# Altium PCB ESC_GEMINI.PcbDoc (part 1 of 4)
Units mm, origin at the board's own origin, x right, y up, seen from the top; angles counter-clockwise.
Board outline 12 x 35 mm, 6 copper layers (F.Cu, In1.Cu, In2.Cu, In3.Cu, In4.Cu, B.Cu); 97 components, 64 nets, 285 pads, 618 vias.
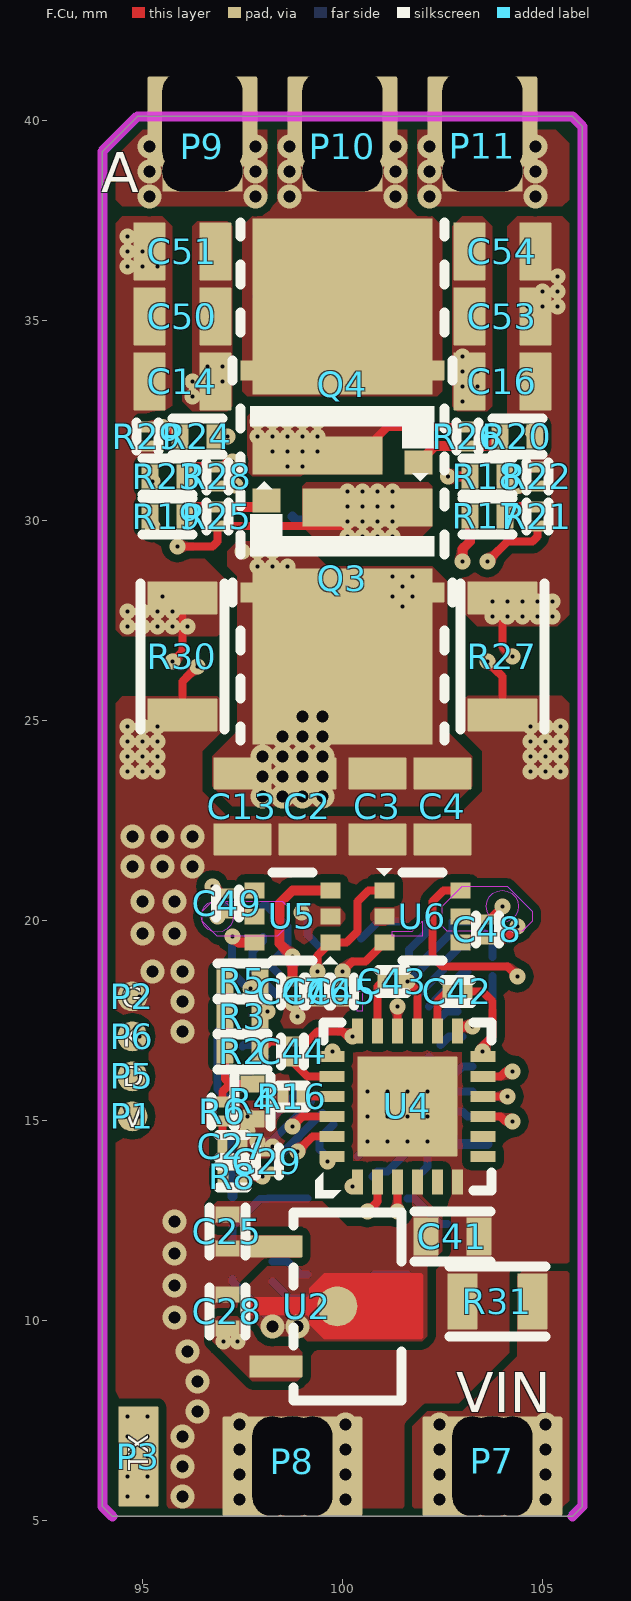
[diagram p0: F.Cu view]
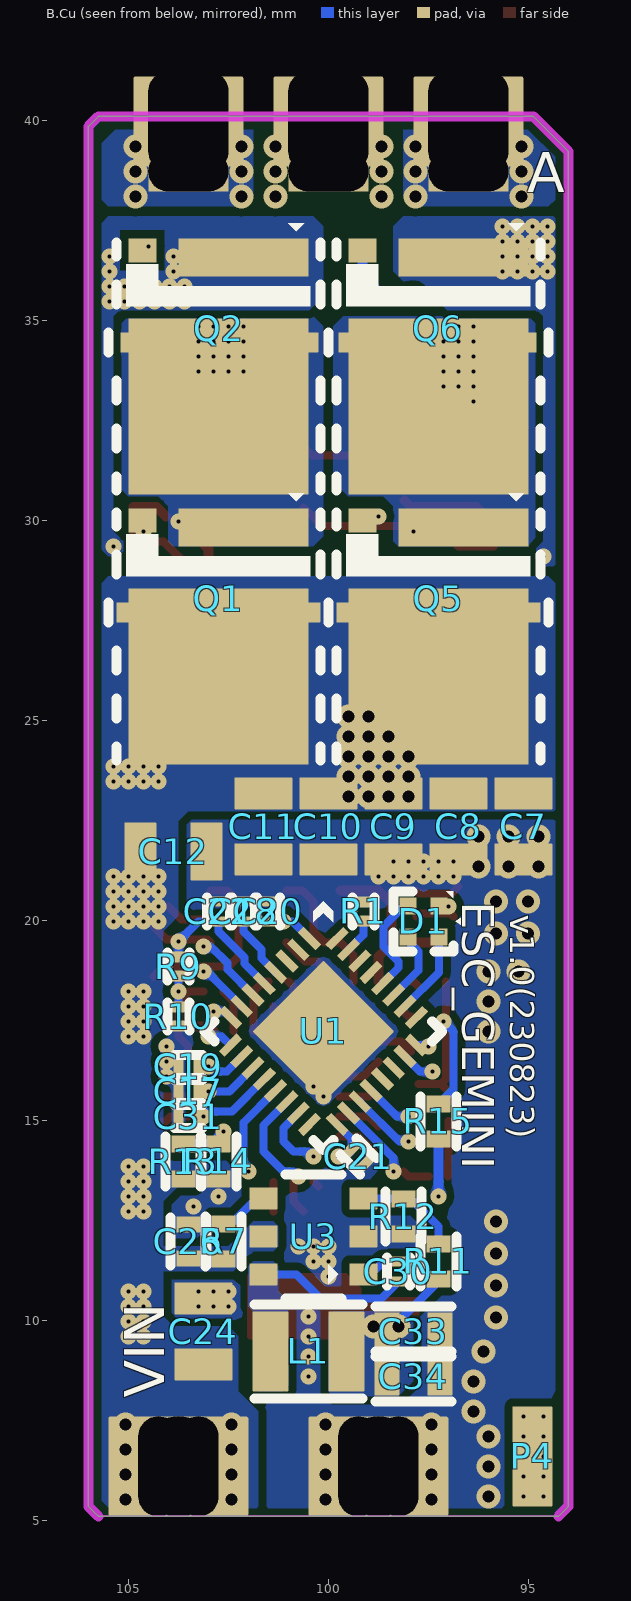
[diagram p1: B.Cu view, seen from below]
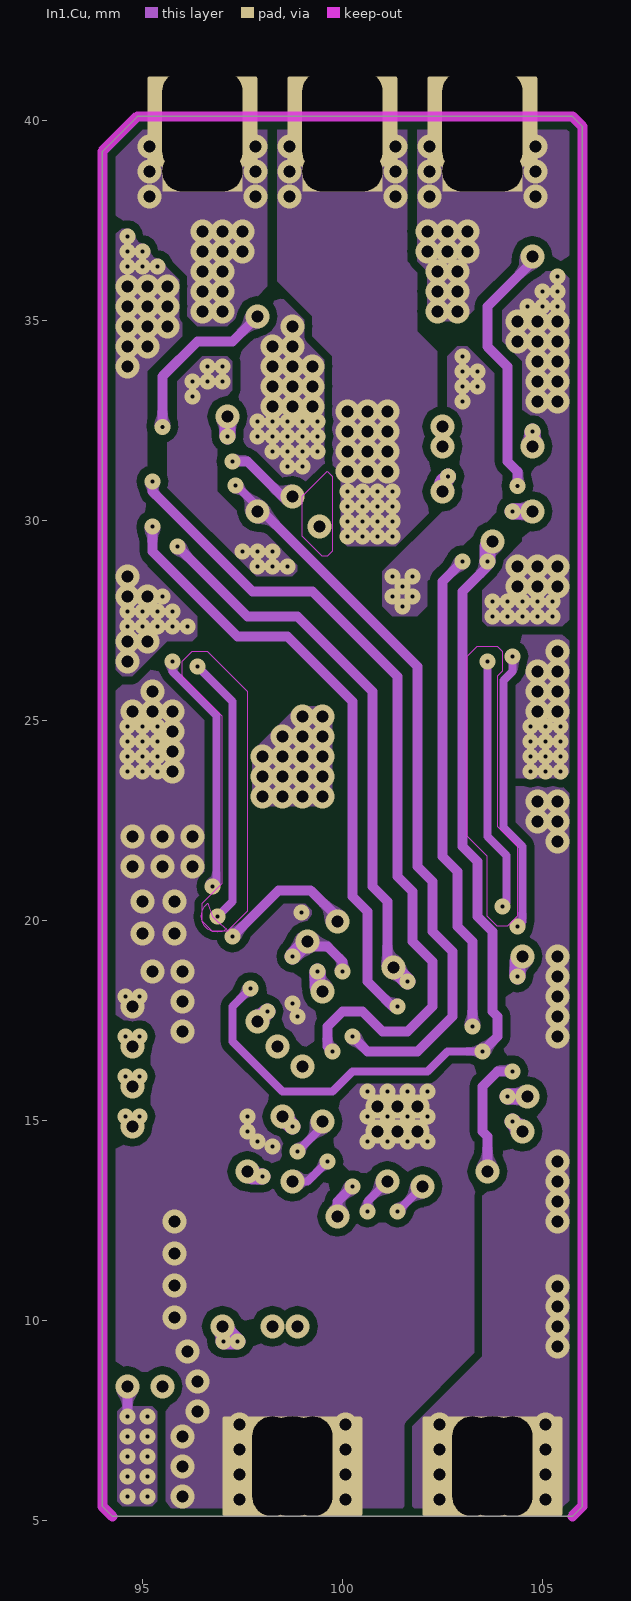
[diagram p2: In1.Cu]
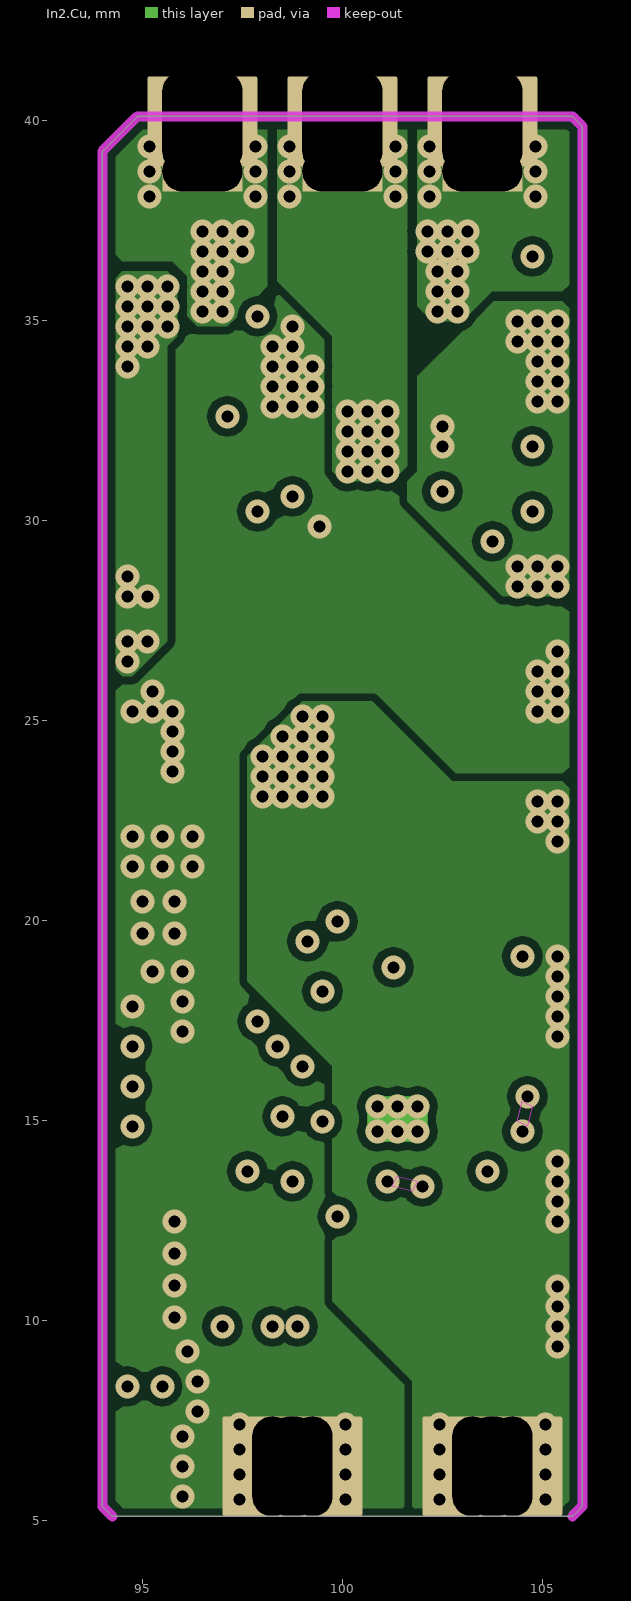
[diagram p3: In2.Cu]
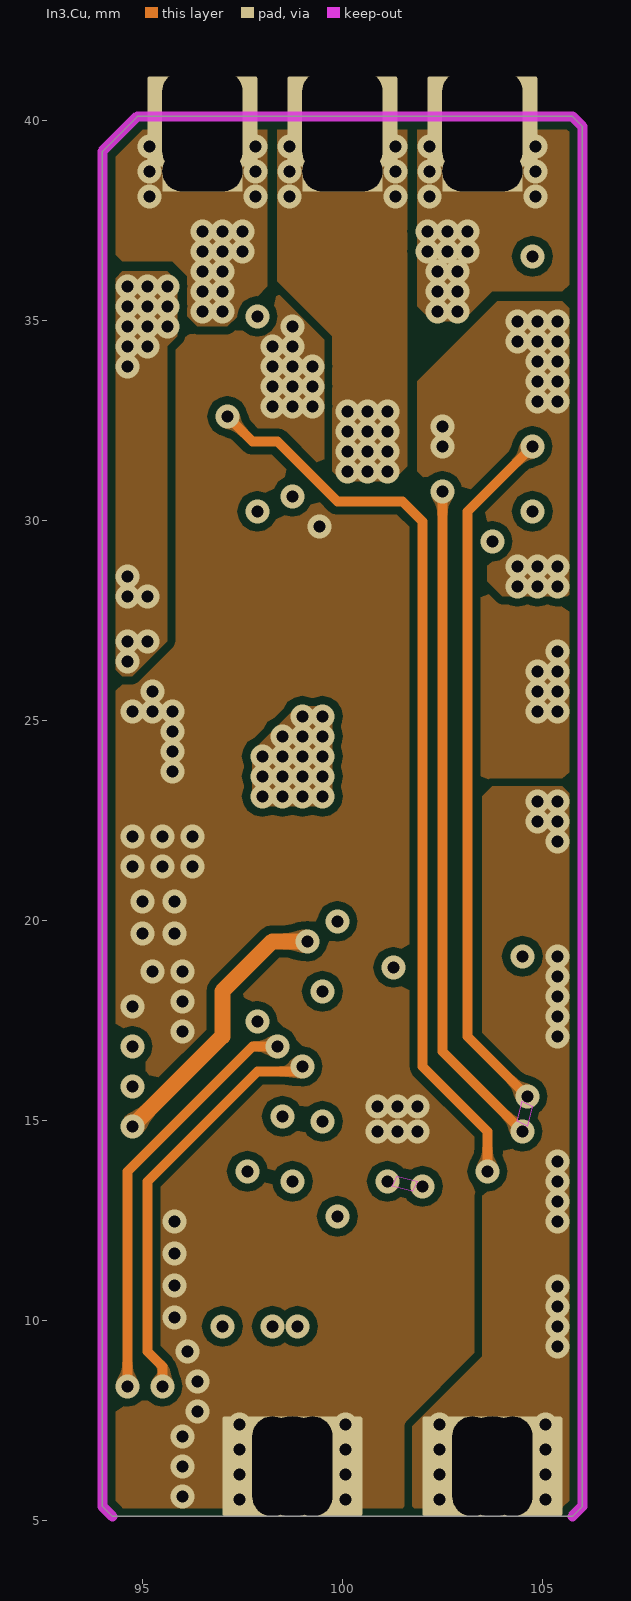
[diagram p4: In3.Cu]
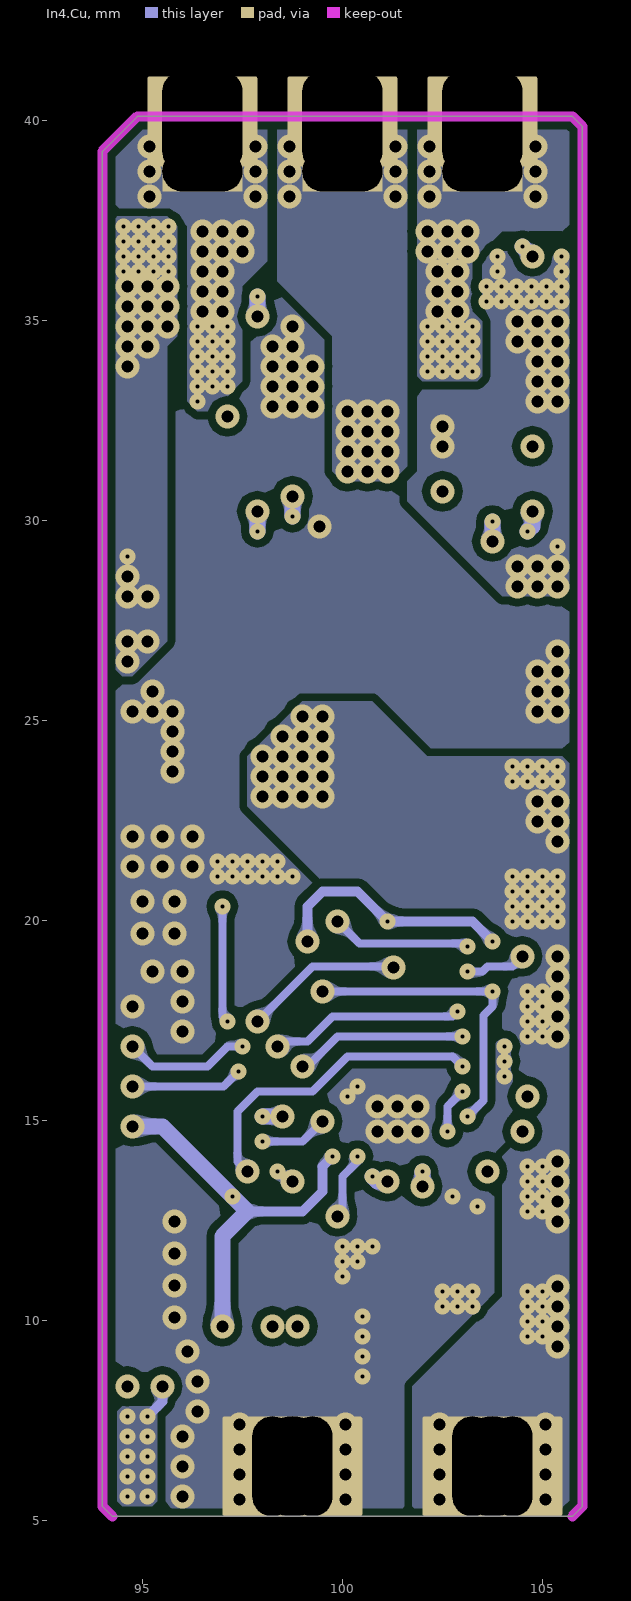
[diagram p5: In4.Cu]

## Layer stack, top to bottom
F.Mask: solder mask 0.0102, Solder Resist, Dk 3.5
F.Cu: signal copper 0.0356
Dielectric 1: dielectric 0.32, FR-4, Dk 4.8
In1.Cu: signal copper 0.0356
Dielectric2: dielectric 0.32, FR-4, Dk 4.8
In2.Cu: signal copper 0.0356
Dielectric3: dielectric 0.32, FR-4, Dk 4.8
In3.Cu: signal copper 0.0356
Dielectric4: dielectric 0.32, FR-4, Dk 4.8
In4.Cu: signal copper 0.0356
Dielectric5: dielectric 0.32, FR-4, Dk 4.8
B.Cu: signal copper 0.0356
B.Mask: solder mask 0.0102, Solder Resist, Dk 3.5

## Board outline
94.25,5.1 94,5.35 94,39.225 94.875,40.1 105.75,40.1 106,39.85 106,5.35 105.75,5.1 94.25,5.1

## Design rules (kind name [scope] priority, off if disabled: settings)
Clearance "Clearence 0.2_Polygon" [InNamedPolygon('F.Cu-/GND_C') OR InNamedPolygon('F.Cu-VBUS') OR InNamedPolygon('F.Cu-+6V') OR InNamedPolygon('F.Cu-/CTRL/PHB-1') OR InNamedPolygon('F.Cu-+3V3-3') OR InNamedPolygon('F.Cu-/GND_A-2') OR InNamedPolygon('F.Cu-VBUS-1') OR InNamedPolygon('F.Cu-GND-2') OR InNamedPolygon('F.Cu-VBUS-2') OR InNamedPolygon('F.Cu-/CTRL/PHB-3') OR InNamedPolygon('F.Cu-VBUS-3') OR InNamedPolygon('F.Cu-GND-3') OR InNamedPolygon('F.Cu-/CTRL/PHA-2') OR InNamedPolygon('B.Cu-/CTRL/PHA') OR InNamedPolygon('F.Cu-/CTRL/PHC-3') OR InNamedPolygon('B.Cu-/CTRL/PHC') OR InNamedPolygon('In1.Cu-VBUS-1') OR InNamedPolygon('In1.Cu-VBUS-2') OR InNamedPolygon('In1.Cu-/CTRL/PHB-2') OR InNamedPolygon('In1.Cu-/GND_C-2') OR InNamedPolygon('In1.Cu-/GND_A') OR InNamedPolygon('In1.Cu-/CTRL/PWM_IN-P') OR InNamedPolygon('In1.Cu-/CTRL/PHC-5') OR InNamedPolygon('In1.Cu-/CTRL/PHA-4') OR InNamedPolygon('In2.Cu-/CTRL/PHA') OR InNamedPolygon('In3.Cu-/CTRL/PHA') OR InNamedPolygon('In1.Cu-GND') OR InNamedPolygon('In2.Cu-GND') OR InNamedPolygon('In3.Cu-GND') OR InNamedPolygon('In4.Cu-GND') OR InNamedPolygon('B.Cu-GND') OR InNamedPolygon('In1.Cu-VBUS-3') OR InNamedPolygon('In3.Cu-VBUS-1') OR InNamedPolygon('In2.Cu-VBUS-1') OR InNamedPolygon('In2.Cu-/CTRL/PHC') OR InNamedPolygon('In3.Cu-/CTRL/PHC') OR InNamedPolygon('In2.Cu-/GND_A') OR InNamedPolygon('In3.Cu-/GND_A') OR InNamedPolygon('In4.Cu-/GND_A') OR InNamedPolygon('In2.Cu-/CTRL/PHB') OR InNamedPolygon('In3.Cu-/CTRL/PHB') OR InNamedPolygon('In4.Cu-/CTRL/PHB') OR InNamedPolygon('In2.Cu-/GND_C') OR InNamedPolygon('In4.Cu-/GND_C') OR InNamedPolygon('In3.Cu-/GND_C') OR InNamedPolygon('In4.Cu-/CTRL/PHA-1') OR InNamedPolygon('In4.Cu-/GND_A-1') OR InNamedPolygon('In4.Cu-VBUS-1') OR InNamedPolygon('In4.Cu-/CTRL/PHC') OR InNamedPolygon('In4.Cu-/CTRL/PWM_IN-N-1') OR InNamedPolygon('In4.Cu-/GND_C-1') OR InNamedPolygon('B.Cu-/CTRL/PHC-1') OR InNamedPolygon('B.Cu-VBUS-1') OR InNamedPolygon('B.Cu-/GND_A') OR InNamedPolygon('B.Cu-+6V') OR InNamedPolygon('B.Cu-VBUS-2') OR InNamedPolygon('B.Cu-/GND_A-1') OR InNamedPolygon('B.Cu-VBUS-3') OR InNamedPolygon('B.Cu-/GND_C') OR InNamedPolygon('B.Cu-Net-(U3-SW)') OR InNamedPolygon('B.Cu-/GND_C-1') OR InNamedPolygon('B.Cu-/CTRL/PHA-1')] p1: gap=0.2 ignorepadtopadclearanceinfootprint=FALSE
MinimumSolderMaskSliver [All] p1: minsoldermaskwidth=0
PolygonConnect Polygon_B.Cu-/CTRL/PHA-1_ConnectDirect [IsNamedPolygon('B.Cu-/CTRL/PHA-1')] p1: connectstyle=Direct reliefconductorwidth=0.254 reliefentries=4 polygonreliefangle="90 Angle" airgapwidth=0.254
PolygonConnect Polygon_B.Cu-Net-(Q6-Gate)_ConnectDirect [IsNamedPolygon('B.Cu-Net-(Q6-Gate)')] p2: connectstyle=Direct reliefconductorwidth=0.254 reliefentries=4 polygonreliefangle="90 Angle" airgapwidth=0.254
PolygonConnect Polygon_B.Cu-/GND_C-1_ConnectDirect [IsNamedPolygon('B.Cu-/GND_C-1')] p3: connectstyle=Direct reliefconductorwidth=0.254 reliefentries=4 polygonreliefangle="90 Angle" airgapwidth=0.254
PolygonConnect Polygon_B.Cu-/CTRL/SWCLK_ConnectDirect [IsNamedPolygon('B.Cu-/CTRL/SWCLK')] p4: connectstyle=Direct reliefconductorwidth=0.254 reliefentries=4 polygonreliefangle="90 Angle" airgapwidth=0.254
PolygonConnect Polygon_B.Cu-Net-(U3-SW)_ConnectDirect [IsNamedPolygon('B.Cu-Net-(U3-SW)')] p5: connectstyle=Direct reliefconductorwidth=0.254 reliefentries=4 polygonreliefangle="90 Angle" airgapwidth=0.254
PolygonConnect Polygon_B.Cu-/CTRL/BEMF_U-1_ConnectDirect [IsNamedPolygon('B.Cu-/CTRL/BEMF_U-1')] p6: connectstyle=Direct reliefconductorwidth=0.254 reliefentries=4 polygonreliefangle="90 Angle" airgapwidth=0.254
PolygonConnect Polygon_B.Cu-/GND_C_ConnectDirect [IsNamedPolygon('B.Cu-/GND_C')] p7: connectstyle=Direct reliefconductorwidth=0.254 reliefentries=4 polygonreliefangle="90 Angle" airgapwidth=0.254
PolygonConnect Polygon_B.Cu-/CTRL/PWM-BN_ConnectDirect [IsNamedPolygon('B.Cu-/CTRL/PWM-BN')] p8: connectstyle=Direct reliefconductorwidth=0.254 reliefentries=4 polygonreliefangle="90 Angle" airgapwidth=0.254
PolygonConnect Polygon_B.Cu-/CTRL/PWM-CN_ConnectDirect [IsNamedPolygon('B.Cu-/CTRL/PWM-CN')] p9: connectstyle=Direct reliefconductorwidth=0.254 reliefentries=4 polygonreliefangle="90 Angle" airgapwidth=0.254
PolygonConnect Polygon_B.Cu-/CTRL/PWM_IN-P_ConnectDirect [IsNamedPolygon('B.Cu-/CTRL/PWM_IN-P')] p10: connectstyle=Direct reliefconductorwidth=0.254 reliefentries=4 polygonreliefangle="90 Angle" airgapwidth=0.254
PolygonConnect Polygon_B.Cu-+3V3-3_ConnectDirect [IsNamedPolygon('B.Cu-+3V3-3')] p11: connectstyle=Direct reliefconductorwidth=0.254 reliefentries=4 polygonreliefangle="90 Angle" airgapwidth=0.254
PolygonConnect Polygon_B.Cu-+3V3-2_ConnectDirect [IsNamedPolygon('B.Cu-+3V3-2')] p12: connectstyle=Direct reliefconductorwidth=0.254 reliefentries=4 polygonreliefangle="90 Angle" airgapwidth=0.254
PolygonConnect Polygon_B.Cu-VBUS-3_ConnectDirect [IsNamedPolygon('B.Cu-VBUS-3')] p13: connectstyle=Direct reliefconductorwidth=0.254 reliefentries=4 polygonreliefangle="90 Angle" airgapwidth=0.254
PolygonConnect Polygon_B.Cu-/GND_A-1_ConnectDirect [IsNamedPolygon('B.Cu-/GND_A-1')] p14: connectstyle=Direct reliefconductorwidth=0.254 reliefentries=4 polygonreliefangle="90 Angle" airgapwidth=0.254
PolygonConnect Polygon_B.Cu-/CTRL/VBUS_SNS_U_ConnectDirect [IsNamedPolygon('B.Cu-/CTRL/VBUS_SNS_U')] p15: connectstyle=Direct reliefconductorwidth=0.254 reliefentries=4 polygonreliefangle="90 Angle" airgapwidth=0.254
PolygonConnect Polygon_B.Cu-/CTRL/PWM-BP_ConnectDirect [IsNamedPolygon('B.Cu-/CTRL/PWM-BP')] p16: connectstyle=Direct reliefconductorwidth=0.254 reliefentries=4 polygonreliefangle="90 Angle" airgapwidth=0.254
PolygonConnect Polygon_B.Cu-/CTRL/PWM_IN-N_ConnectDirect [IsNamedPolygon('B.Cu-/CTRL/PWM_IN-N')] p17: connectstyle=Direct reliefconductorwidth=0.254 reliefentries=4 polygonreliefangle="90 Angle" airgapwidth=0.254
PolygonConnect Polygon_B.Cu-Net-(Q5-Gate)_ConnectDirect [IsNamedPolygon('B.Cu-Net-(Q5-Gate)')] p18: connectstyle=Direct reliefconductorwidth=0.254 reliefentries=4 polygonreliefangle="90 Angle" airgapwidth=0.254
PolygonConnect Polygon_B.Cu-VBUS-2_ConnectDirect [IsNamedPolygon('B.Cu-VBUS-2')] p19: connectstyle=Direct reliefconductorwidth=0.254 reliefentries=4 polygonreliefangle="90 Angle" airgapwidth=0.254
PolygonConnect Polygon_B.Cu-/CTRL/I_SNS_A_ConnectDirect [IsNamedPolygon('B.Cu-/CTRL/I_SNS_A')] p20: connectstyle=Direct reliefconductorwidth=0.254 reliefentries=4 polygonreliefangle="90 Angle" airgapwidth=0.254
PolygonConnect Polygon_B.Cu-+6V_ConnectDirect [IsNamedPolygon('B.Cu-+6V')] p21: connectstyle=Direct reliefconductorwidth=0.254 reliefentries=4 polygonreliefangle="90 Angle" airgapwidth=0.254
PolygonConnect Polygon_B.Cu-+3V3-1_ConnectDirect [IsNamedPolygon('B.Cu-+3V3-1')] p22: connectstyle=Direct reliefconductorwidth=0.254 reliefentries=4 polygonreliefangle="90 Angle" airgapwidth=0.254
PolygonConnect Polygon_B.Cu-/CTRL/PWM-AP_ConnectDirect [IsNamedPolygon('B.Cu-/CTRL/PWM-AP')] p23: connectstyle=Direct reliefconductorwidth=0.254 reliefentries=4 polygonreliefangle="90 Angle" airgapwidth=0.254
PolygonConnect Polygon_B.Cu-/CTRL/PWM-CP_ConnectDirect [IsNamedPolygon('B.Cu-/CTRL/PWM-CP')] p24: connectstyle=Direct reliefconductorwidth=0.254 reliefentries=4 polygonreliefangle="90 Angle" airgapwidth=0.254
PolygonConnect Polygon_B.Cu-/GND_A_ConnectDirect [IsNamedPolygon('B.Cu-/GND_A')] p25: connectstyle=Direct reliefconductorwidth=0.254 reliefentries=4 polygonreliefangle="90 Angle" airgapwidth=0.254
PolygonConnect Polygon_B.Cu-/CTRL/SWDIO_ConnectDirect [IsNamedPolygon('B.Cu-/CTRL/SWDIO')] p26: connectstyle=Direct reliefconductorwidth=0.254 reliefentries=4 polygonreliefangle="90 Angle" airgapwidth=0.254
PolygonConnect Polygon_B.Cu-/CTRL/VREF_U_ConnectDirect [IsNamedPolygon('B.Cu-/CTRL/VREF_U')] p27: connectstyle=Direct reliefconductorwidth=0.254 reliefentries=4 polygonreliefangle="90 Angle" airgapwidth=0.254
PolygonConnect Polygon_B.Cu-/CTRL/BEMF_U_ConnectDirect [IsNamedPolygon('B.Cu-/CTRL/BEMF_U')] p28: connectstyle=Direct reliefconductorwidth=0.254 reliefentries=4 polygonreliefangle="90 Angle" airgapwidth=0.254
PolygonConnect Polygon_B.Cu-+3V3_ConnectDirect [IsNamedPolygon('B.Cu-+3V3')] p29: connectstyle=Direct reliefconductorwidth=0.254 reliefentries=4 polygonreliefangle="90 Angle" airgapwidth=0.254
PolygonConnect Polygon_B.Cu-/CTRL/PWM-AN_ConnectDirect [IsNamedPolygon('B.Cu-/CTRL/PWM-AN')] p30: connectstyle=Direct reliefconductorwidth=0.254 reliefentries=4 polygonreliefangle="90 Angle" airgapwidth=0.254
PolygonConnect Polygon_B.Cu-/CTRL/I_SNS_B_ConnectDirect [IsNamedPolygon('B.Cu-/CTRL/I_SNS_B')] p31: connectstyle=Direct reliefconductorwidth=0.254 reliefentries=4 polygonreliefangle="90 Angle" airgapwidth=0.254
PolygonConnect Polygon_B.Cu-Net-(D1-Anode)-1_ConnectDirect [IsNamedPolygon('B.Cu-Net-(D1-Anode)-1')] p32: connectstyle=Direct reliefconductorwidth=0.254 reliefentries=4 polygonreliefangle="90 Angle" airgapwidth=0.254
PolygonConnect Polygon_B.Cu-VBUS-1_ConnectDirect [IsNamedPolygon('B.Cu-VBUS-1')] p33: connectstyle=Direct reliefconductorwidth=0.254 reliefentries=4 polygonreliefangle="90 Angle" airgapwidth=0.254
PolygonConnect Polygon_B.Cu-/CTRL/PHC-1_ConnectDirect [IsNamedPolygon('B.Cu-/CTRL/PHC-1')] p34: connectstyle=Direct reliefconductorwidth=0.254 reliefentries=4 polygonreliefangle="90 Angle" airgapwidth=0.254
PolygonConnect Polygon_B.Cu-Net-(D1-Anode)_ConnectDirect [IsNamedPolygon('B.Cu-Net-(D1-Anode)')] p35: connectstyle=Direct reliefconductorwidth=0.254 reliefentries=4 polygonreliefangle="90 Angle" airgapwidth=0.254
PolygonConnect Polygon_In4.Cu-/CTRL/PWM_IN-N-3_ConnectDirect [IsNamedPolygon('In4.Cu-/CTRL/PWM_IN-N-3')] p36: connectstyle=Direct reliefconductorwidth=0.254 reliefentries=4 polygonreliefangle="90 Angle" airgapwidth=0.254
PolygonConnect Polygon_In4.Cu-/CTRL/VREF_U-3_ConnectDirect [IsNamedPolygon('In4.Cu-/CTRL/VREF_U-3')] p37: connectstyle=Direct reliefconductorwidth=0.254 reliefentries=4 polygonreliefangle="90 Angle" airgapwidth=0.254
PolygonConnect Polygon_In4.Cu-/CTRL/PWM_IN-N-2_ConnectDirect [IsNamedPolygon('In4.Cu-/CTRL/PWM_IN-N-2')] p38: connectstyle=Direct reliefconductorwidth=0.254 reliefentries=4 polygonreliefangle="90 Angle" airgapwidth=0.254
PolygonConnect Polygon_In4.Cu-/CTRL/PWM_IN-P-1_ConnectDirect [IsNamedPolygon('In4.Cu-/CTRL/PWM_IN-P-1')] p39: connectstyle=Direct reliefconductorwidth=0.254 reliefentries=4 polygonreliefangle="90 Angle" airgapwidth=0.254
PolygonConnect Polygon_In4.Cu-/CTRL/PHC-1_ConnectDirect [IsNamedPolygon('In4.Cu-/CTRL/PHC-1')] p40: connectstyle=Direct reliefconductorwidth=0.254 reliefentries=4 polygonreliefangle="90 Angle" airgapwidth=0.254
PolygonConnect Polygon_In4.Cu-/GND_C-1_ConnectDirect [IsNamedPolygon('In4.Cu-/GND_C-1')] p41: connectstyle=Direct reliefconductorwidth=0.254 reliefentries=4 polygonreliefangle="90 Angle" airgapwidth=0.254
PolygonConnect Polygon_In4.Cu-/CTRL/SWCLK-1_ConnectDirect [IsNamedPolygon('In4.Cu-/CTRL/SWCLK-1')] p42: connectstyle=Direct reliefconductorwidth=0.254 reliefentries=4 polygonreliefangle="90 Angle" airgapwidth=0.254
PolygonConnect Polygon_In4.Cu-+3V3-8_ConnectDirect [IsNamedPolygon('In4.Cu-+3V3-8')] p43: connectstyle=Direct reliefconductorwidth=0.254 reliefentries=4 polygonreliefangle="90 Angle" airgapwidth=0.254
PolygonConnect Polygon_In4.Cu-/CTRL/I_SNS_A-1_ConnectDirect [IsNamedPolygon('In4.Cu-/CTRL/I_SNS_A-1')] p44: connectstyle=Direct reliefconductorwidth=0.254 reliefentries=4 polygonreliefangle="90 Angle" airgapwidth=0.254
PolygonConnect Polygon_In4.Cu-/CTRL/SWDIO-1_ConnectDirect [IsNamedPolygon('In4.Cu-/CTRL/SWDIO-1')] p45: connectstyle=Direct reliefconductorwidth=0.254 reliefentries=4 polygonreliefangle="90 Angle" airgapwidth=0.254
PolygonConnect Polygon_In4.Cu-/CTRL/VREF_U-2_ConnectDirect [IsNamedPolygon('In4.Cu-/CTRL/VREF_U-2')] p46: connectstyle=Direct reliefconductorwidth=0.254 reliefentries=4 polygonreliefangle="90 Angle" airgapwidth=0.254
PolygonConnect Polygon_In4.Cu-/CTRL/I_SNS_B-1_ConnectDirect [IsNamedPolygon('In4.Cu-/CTRL/I_SNS_B-1')] p47: connectstyle=Direct reliefconductorwidth=0.254 reliefentries=4 polygonreliefangle="90 Angle" airgapwidth=0.254
PolygonConnect Polygon_In4.Cu-+3V3-7_ConnectDirect [IsNamedPolygon('In4.Cu-+3V3-7')] p48: connectstyle=Direct reliefconductorwidth=0.254 reliefentries=4 polygonreliefangle="90 Angle" airgapwidth=0.254
PolygonConnect Polygon_In4.Cu-Net-(D1-Anode)-1_ConnectDirect [IsNamedPolygon('In4.Cu-Net-(D1-Anode)-1')] p49: connectstyle=Direct reliefconductorwidth=0.254 reliefentries=4 polygonreliefangle="90 Angle" airgapwidth=0.254
PolygonConnect Polygon_In4.Cu-/CTRL/PWM_IN-N-1_ConnectDirect [IsNamedPolygon('In4.Cu-/CTRL/PWM_IN-N-1')] p50: connectstyle=Direct reliefconductorwidth=0.254 reliefentries=4 polygonreliefangle="90 Angle" airgapwidth=0.254
PolygonConnect Polygon_In4.Cu-/CTRL/VBUS_SNS_U-1_ConnectDirect [IsNamedPolygon('In4.Cu-/CTRL/VBUS_SNS_U-1')] p51: connectstyle=Direct reliefconductorwidth=0.254 reliefentries=4 polygonreliefangle="90 Angle" airgapwidth=0.254
PolygonConnect Polygon_In4.Cu-/CTRL/PHC_ConnectDirect [IsNamedPolygon('In4.Cu-/CTRL/PHC')] p52: connectstyle=Direct reliefconductorwidth=0.254 reliefentries=4 polygonreliefangle="90 Angle" airgapwidth=0.254
PolygonConnect Polygon_In4.Cu-+3V3-6_ConnectDirect [IsNamedPolygon('In4.Cu-+3V3-6')] p53: connectstyle=Direct reliefconductorwidth=0.254 reliefentries=4 polygonreliefangle="90 Angle" airgapwidth=0.254
PolygonConnect Polygon_In4.Cu-/CTRL/PWM-AP_ConnectDirect [IsNamedPolygon('In4.Cu-/CTRL/PWM-AP')] p54: connectstyle=Direct reliefconductorwidth=0.254 reliefentries=4 polygonreliefangle="90 Angle" airgapwidth=0.254
PolygonConnect Polygon_In4.Cu-/CTRL/PWM-AN-1_ConnectDirect [IsNamedPolygon('In4.Cu-/CTRL/PWM-AN-1')] p55: connectstyle=Direct reliefconductorwidth=0.254 reliefentries=4 polygonreliefangle="90 Angle" airgapwidth=0.254
PolygonConnect Polygon_In4.Cu-+3V3-5_ConnectDirect [IsNamedPolygon('In4.Cu-+3V3-5')] p56: connectstyle=Direct reliefconductorwidth=0.254 reliefentries=4 polygonreliefangle="90 Angle" airgapwidth=0.254
PolygonConnect Polygon_In4.Cu-Net-(Q6-Gate)_ConnectDirect [IsNamedPolygon('In4.Cu-Net-(Q6-Gate)')] p57: connectstyle=Direct reliefconductorwidth=0.254 reliefentries=4 polygonreliefangle="90 Angle" airgapwidth=0.254
PolygonConnect Polygon_In4.Cu-/CTRL/VREF_U-1_ConnectDirect [IsNamedPolygon('In4.Cu-/CTRL/VREF_U-1')] p58: connectstyle=Direct reliefconductorwidth=0.254 reliefentries=4 polygonreliefangle="90 Angle" airgapwidth=0.254
PolygonConnect Polygon_In4.Cu-+3V3-4_ConnectDirect [IsNamedPolygon('In4.Cu-+3V3-4')] p59: connectstyle=Direct reliefconductorwidth=0.254 reliefentries=4 polygonreliefangle="90 Angle" airgapwidth=0.254
PolygonConnect Polygon_In4.Cu-/CTRL/BEMF_U-1_ConnectDirect [IsNamedPolygon('In4.Cu-/CTRL/BEMF_U-1')] p60: connectstyle=Direct reliefconductorwidth=0.254 reliefentries=4 polygonreliefangle="90 Angle" airgapwidth=0.254
PolygonConnect Polygon_In4.Cu-VBUS-1_ConnectDirect [IsNamedPolygon('In4.Cu-VBUS-1')] p61: connectstyle=Direct reliefconductorwidth=0.254 reliefentries=4 polygonreliefangle="90 Angle" airgapwidth=0.254
PolygonConnect Polygon_In4.Cu-/GND_A-1_ConnectDirect [IsNamedPolygon('In4.Cu-/GND_A-1')] p62: connectstyle=Direct reliefconductorwidth=0.254 reliefentries=4 polygonreliefangle="90 Angle" airgapwidth=0.254
PolygonConnect Polygon_In4.Cu-/CTRL/PHB-2_ConnectDirect [IsNamedPolygon('In4.Cu-/CTRL/PHB-2')] p63: connectstyle=Direct reliefconductorwidth=0.254 reliefentries=4 polygonreliefangle="90 Angle" airgapwidth=0.254
PolygonConnect Polygon_In4.Cu-/CTRL/PHA-1_ConnectDirect [IsNamedPolygon('In4.Cu-/CTRL/PHA-1')] p64: connectstyle=Direct reliefconductorwidth=0.254 reliefentries=4 polygonreliefangle="90 Angle" airgapwidth=0.254
PolygonConnect Polygon_In4.Cu-/CTRL/I_SNS_B_ConnectDirect [IsNamedPolygon('In4.Cu-/CTRL/I_SNS_B')] p65: connectstyle=Direct reliefconductorwidth=0.254 reliefentries=4 polygonreliefangle="90 Angle" airgapwidth=0.254
PolygonConnect Polygon_In4.Cu-+3V3-3_ConnectDirect [IsNamedPolygon('In4.Cu-+3V3-3')] p66: connectstyle=Direct reliefconductorwidth=0.254 reliefentries=4 polygonreliefangle="90 Angle" airgapwidth=0.254
PolygonConnect Polygon_In4.Cu-/CTRL/PWM-BN_ConnectDirect [IsNamedPolygon('In4.Cu-/CTRL/PWM-BN')] p67: connectstyle=Direct reliefconductorwidth=0.254 reliefentries=4 polygonreliefangle="90 Angle" airgapwidth=0.254
PolygonConnect Polygon_In4.Cu-Net-(Q5-Gate)_ConnectDirect [IsNamedPolygon('In4.Cu-Net-(Q5-Gate)')] p68: connectstyle=Direct reliefconductorwidth=0.254 reliefentries=4 polygonreliefangle="90 Angle" airgapwidth=0.254
PolygonConnect Polygon_In4.Cu-Net-(Q1-Gate)_ConnectDirect [IsNamedPolygon('In4.Cu-Net-(Q1-Gate)')] p69: connectstyle=Direct reliefconductorwidth=0.254 reliefentries=4 polygonreliefangle="90 Angle" airgapwidth=0.254
PolygonConnect Polygon_In4.Cu-/CTRL/PHA_ConnectDirect [IsNamedPolygon('In4.Cu-/CTRL/PHA')] p70: connectstyle=Direct reliefconductorwidth=0.254 reliefentries=4 polygonreliefangle="90 Angle" airgapwidth=0.254
PolygonConnect Polygon_In4.Cu-/CTRL/SWDIO_ConnectDirect [IsNamedPolygon('In4.Cu-/CTRL/SWDIO')] p71: connectstyle=Direct reliefconductorwidth=0.254 reliefentries=4 polygonreliefangle="90 Angle" airgapwidth=0.254
PolygonConnect Polygon_In4.Cu-/CTRL/PWM-BP-1_ConnectDirect [IsNamedPolygon('In4.Cu-/CTRL/PWM-BP-1')] p72: connectstyle=Direct reliefconductorwidth=0.254 reliefentries=4 polygonreliefangle="90 Angle" airgapwidth=0.254
PolygonConnect Polygon_In4.Cu-Net-(D1-Anode)_ConnectDirect [IsNamedPolygon('In4.Cu-Net-(D1-Anode)')] p73: connectstyle=Direct reliefconductorwidth=0.254 reliefentries=4 polygonreliefangle="90 Angle" airgapwidth=0.254
PolygonConnect Polygon_In4.Cu-+3V3-2_ConnectDirect [IsNamedPolygon('In4.Cu-+3V3-2')] p74: connectstyle=Direct reliefconductorwidth=0.254 reliefentries=4 polygonreliefangle="90 Angle" airgapwidth=0.254
PolygonConnect Polygon_In4.Cu-/CTRL/BEMF_U_ConnectDirect [IsNamedPolygon('In4.Cu-/CTRL/BEMF_U')] p75: connectstyle=Direct reliefconductorwidth=0.254 reliefentries=4 polygonreliefangle="90 Angle" airgapwidth=0.254
PolygonConnect Polygon_In4.Cu-/CTRL/PWM-CP-1_ConnectDirect [IsNamedPolygon('In4.Cu-/CTRL/PWM-CP-1')] p76: connectstyle=Direct reliefconductorwidth=0.254 reliefentries=4 polygonreliefangle="90 Angle" airgapwidth=0.254
PolygonConnect Polygon_In4.Cu-/CTRL/PHB-1_ConnectDirect [IsNamedPolygon('In4.Cu-/CTRL/PHB-1')] p77: connectstyle=Direct reliefconductorwidth=0.254 reliefentries=4 polygonreliefangle="90 Angle" airgapwidth=0.254
PolygonConnect Polygon_In4.Cu-/CTRL/PWM-CP_ConnectDirect [IsNamedPolygon('In4.Cu-/CTRL/PWM-CP')] p78: connectstyle=Direct reliefconductorwidth=0.254 reliefentries=4 polygonreliefangle="90 Angle" airgapwidth=0.254
PolygonConnect Polygon_In4.Cu-Net-(Q2-Gate)_ConnectDirect [IsNamedPolygon('In4.Cu-Net-(Q2-Gate)')] p79: connectstyle=Direct reliefconductorwidth=0.254 reliefentries=4 polygonreliefangle="90 Angle" airgapwidth=0.254
PolygonConnect Polygon_In4.Cu-/CTRL/I_SNS_A_ConnectDirect [IsNamedPolygon('In4.Cu-/CTRL/I_SNS_A')] p80: connectstyle=Direct reliefconductorwidth=0.254 reliefentries=4 polygonreliefangle="90 Angle" airgapwidth=0.254
PolygonConnect Polygon_In4.Cu-/CTRL/PWM_IN-N_ConnectDirect [IsNamedPolygon('In4.Cu-/CTRL/PWM_IN-N')] p81: connectstyle=Direct reliefconductorwidth=0.254 reliefentries=4 polygonreliefangle="90 Angle" airgapwidth=0.254
PolygonConnect Polygon_In4.Cu-/CTRL/SWCLK_ConnectDirect [IsNamedPolygon('In4.Cu-/CTRL/SWCLK')] p82: connectstyle=Direct reliefconductorwidth=0.254 reliefentries=4 polygonreliefangle="90 Angle" airgapwidth=0.254
PolygonConnect Polygon_In4.Cu-+3V3-1_ConnectDirect [IsNamedPolygon('In4.Cu-+3V3-1')] p83: connectstyle=Direct reliefconductorwidth=0.254 reliefentries=4 polygonreliefangle="90 Angle" airgapwidth=0.254
PolygonConnect Polygon_In4.Cu-+3V3_ConnectDirect [IsNamedPolygon('In4.Cu-+3V3')] p84: connectstyle=Direct reliefconductorwidth=0.254 reliefentries=4 polygonreliefangle="90 Angle" airgapwidth=0.254
PolygonConnect Polygon_In4.Cu-/CTRL/VREF_U_ConnectDirect [IsNamedPolygon('In4.Cu-/CTRL/VREF_U')] p85: connectstyle=Direct reliefconductorwidth=0.254 reliefentries=4 polygonreliefangle="90 Angle" airgapwidth=0.254
PolygonConnect Polygon_In4.Cu-/CTRL/PWM-BP_ConnectDirect [IsNamedPolygon('In4.Cu-/CTRL/PWM-BP')] p86: connectstyle=Direct reliefconductorwidth=0.254 reliefentries=4 polygonreliefangle="90 Angle" airgapwidth=0.254
PolygonConnect Polygon_In4.Cu-/CTRL/PWM-CN_ConnectDirect [IsNamedPolygon('In4.Cu-/CTRL/PWM-CN')] p87: connectstyle=Direct reliefconductorwidth=0.254 reliefentries=4 polygonreliefangle="90 Angle" airgapwidth=0.254
PolygonConnect Polygon_In4.Cu-/CTRL/VBUS_SNS_U_ConnectDirect [IsNamedPolygon('In4.Cu-/CTRL/VBUS_SNS_U')] p88: connectstyle=Direct reliefconductorwidth=0.254 reliefentries=4 polygonreliefangle="90 Angle" airgapwidth=0.254
PolygonConnect Polygon_In4.Cu-/CTRL/PWM_IN-P_ConnectDirect [IsNamedPolygon('In4.Cu-/CTRL/PWM_IN-P')] p89: connectstyle=Direct reliefconductorwidth=0.254 reliefentries=4 polygonreliefangle="90 Angle" airgapwidth=0.254
PolygonConnect Polygon_In4.Cu-/CTRL/PWM-AN_ConnectDirect [IsNamedPolygon('In4.Cu-/CTRL/PWM-AN')] p90: connectstyle=Direct reliefconductorwidth=0.254 reliefentries=4 polygonreliefangle="90 Angle" airgapwidth=0.254
PolygonConnect Polygon_In3.Cu-Net-(U4-BG_C)-1_ConnectDirect [IsNamedPolygon('In3.Cu-Net-(U4-BG_C)-1')] p91: connectstyle=Direct reliefconductorwidth=0.254 reliefentries=4 polygonreliefangle="90 Angle" airgapwidth=0.254
PolygonConnect Polygon_In3.Cu-/CTRL/PWM_IN-P-1_ConnectDirect [IsNamedPolygon('In3.Cu-/CTRL/PWM_IN-P-1')] p92: connectstyle=Direct reliefconductorwidth=0.254 reliefentries=4 polygonreliefangle="90 Angle" airgapwidth=0.254
PolygonConnect Polygon_In3.Cu-/CTRL/PWM_IN-P_ConnectDirect [IsNamedPolygon('In3.Cu-/CTRL/PWM_IN-P')] p93: connectstyle=Direct reliefconductorwidth=0.254 reliefentries=4 polygonreliefangle="90 Angle" airgapwidth=0.254
PolygonConnect Polygon_In3.Cu-/CTRL/PWM_IN-N-1_ConnectDirect [IsNamedPolygon('In3.Cu-/CTRL/PWM_IN-N-1')] p94: connectstyle=Direct reliefconductorwidth=0.254 reliefentries=4 polygonreliefangle="90 Angle" airgapwidth=0.254
PolygonConnect Polygon_In3.Cu-Net-(U4-BG_B)-1_ConnectDirect [IsNamedPolygon('In3.Cu-Net-(U4-BG_B)-1')] p95: connectstyle=Direct reliefconductorwidth=0.254 reliefentries=4 polygonreliefangle="90 Angle" airgapwidth=0.254
PolygonConnect Polygon_In3.Cu-+3V3-1_ConnectDirect [IsNamedPolygon('In3.Cu-+3V3-1')] p96: connectstyle=Direct reliefconductorwidth=0.254 reliefentries=4 polygonreliefangle="90 Angle" airgapwidth=0.254
PolygonConnect Polygon_In3.Cu-Net-(U4-BG_B)_ConnectDirect [IsNamedPolygon('In3.Cu-Net-(U4-BG_B)')] p97: connectstyle=Direct reliefconductorwidth=0.254 reliefentries=4 polygonreliefangle="90 Angle" airgapwidth=0.254
PolygonConnect Polygon_In3.Cu-Net-(U4-BG_A)-1_ConnectDirect [IsNamedPolygon('In3.Cu-Net-(U4-BG_A)-1')] p98: connectstyle=Direct reliefconductorwidth=0.254 reliefentries=4 polygonreliefangle="90 Angle" airgapwidth=0.254
PolygonConnect Polygon_In3.Cu-/CTRL/PWM_IN-N_ConnectDirect [IsNamedPolygon('In3.Cu-/CTRL/PWM_IN-N')] p99: connectstyle=Direct reliefconductorwidth=0.254 reliefentries=4 polygonreliefangle="90 Angle" airgapwidth=0.254
PolygonConnect Polygon_In3.Cu-/GND_C_ConnectDirect [IsNamedPolygon('In3.Cu-/GND_C')] p100: connectstyle=Direct reliefconductorwidth=0.254 reliefentries=4 polygonreliefangle="90 Angle" airgapwidth=0.254
PolygonConnect Polygon_In3.Cu-Net-(U4-BG_A)_ConnectDirect [IsNamedPolygon('In3.Cu-Net-(U4-BG_A)')] p101: connectstyle=Direct reliefconductorwidth=0.254 reliefentries=4 polygonreliefangle="90 Angle" airgapwidth=0.254
PolygonConnect Polygon_In3.Cu-Net-(U4-BG_C)_ConnectDirect [IsNamedPolygon('In3.Cu-Net-(U4-BG_C)')] p102: connectstyle=Direct reliefconductorwidth=0.254 reliefentries=4 polygonreliefangle="90 Angle" airgapwidth=0.254
PolygonConnect Polygon_In3.Cu-+3V3_ConnectDirect [IsNamedPolygon('In3.Cu-+3V3')] p103: connectstyle=Direct reliefconductorwidth=0.254 reliefentries=4 polygonreliefangle="90 Angle" airgapwidth=0.254
PolygonConnect Polygon_In4.Cu-/GND_C_ConnectDirect [IsNamedPolygon('In4.Cu-/GND_C')] p104: connectstyle=Direct reliefconductorwidth=0.254 reliefentries=4 polygonreliefangle="90 Angle" airgapwidth=0.254
PolygonConnect Polygon_In2.Cu-/GND_C_ConnectDirect [IsNamedPolygon('In2.Cu-/GND_C')] p105: connectstyle=Direct reliefconductorwidth=0.254 reliefentries=4 polygonreliefangle="90 Angle" airgapwidth=0.254
PolygonConnect Polygon_In4.Cu-/CTRL/PHB_ConnectDirect [IsNamedPolygon('In4.Cu-/CTRL/PHB')] p106: connectstyle=Direct reliefconductorwidth=0.254 reliefentries=4 polygonreliefangle="90 Angle" airgapwidth=0.254
PolygonConnect Polygon_In3.Cu-/CTRL/PHB_ConnectDirect [IsNamedPolygon('In3.Cu-/CTRL/PHB')] p107: connectstyle=Direct reliefconductorwidth=0.254 reliefentries=4 polygonreliefangle="90 Angle" airgapwidth=0.254
PolygonConnect Polygon_In2.Cu-/CTRL/PHB_ConnectDirect [IsNamedPolygon('In2.Cu-/CTRL/PHB')] p108: connectstyle=Direct reliefconductorwidth=0.254 reliefentries=4 polygonreliefangle="90 Angle" airgapwidth=0.254
PolygonConnect Polygon_In4.Cu-/GND_A_ConnectDirect [IsNamedPolygon('In4.Cu-/GND_A')] p109: connectstyle=Direct reliefconductorwidth=0.254 reliefentries=4 polygonreliefangle="90 Angle" airgapwidth=0.254
PolygonConnect Polygon_In3.Cu-/GND_A_ConnectDirect [IsNamedPolygon('In3.Cu-/GND_A')] p110: connectstyle=Direct reliefconductorwidth=0.254 reliefentries=4 polygonreliefangle="90 Angle" airgapwidth=0.254
PolygonConnect Polygon_In2.Cu-/GND_A_ConnectDirect [IsNamedPolygon('In2.Cu-/GND_A')] p111: connectstyle=Direct reliefconductorwidth=0.254 reliefentries=4 polygonreliefangle="90 Angle" airgapwidth=0.254
PolygonConnect Polygon_In3.Cu-/CTRL/PHC_ConnectDirect [IsNamedPolygon('In3.Cu-/CTRL/PHC')] p112: connectstyle=Direct reliefconductorwidth=0.254 reliefentries=4 polygonreliefangle="90 Angle" airgapwidth=0.254
PolygonConnect Polygon_In2.Cu-/CTRL/PHC_ConnectDirect [IsNamedPolygon('In2.Cu-/CTRL/PHC')] p113: connectstyle=Direct reliefconductorwidth=0.254 reliefentries=4 polygonreliefangle="90 Angle" airgapwidth=0.254
PolygonConnect Polygon_In2.Cu-VBUS-1_ConnectDirect [IsNamedPolygon('In2.Cu-VBUS-1')] p114: connectstyle=Direct reliefconductorwidth=0.254 reliefentries=4 polygonreliefangle="90 Angle" airgapwidth=0.254
PolygonConnect Polygon_In3.Cu-VBUS-1_ConnectDirect [IsNamedPolygon('In3.Cu-VBUS-1')] p115: connectstyle=Direct reliefconductorwidth=0.254 reliefentries=4 polygonreliefangle="90 Angle" airgapwidth=0.254
PolygonConnect Polygon_In1.Cu-VBUS-3_ConnectDirect [IsNamedPolygon('In1.Cu-VBUS-3')] p116: connectstyle=Direct reliefconductorwidth=0.254 reliefentries=4 polygonreliefangle="90 Angle" airgapwidth=0.254
PolygonConnect Polygon_B.Cu-GND_ConnectDirect [IsNamedPolygon('B.Cu-GND')] p117: connectstyle=Direct reliefconductorwidth=0.254 reliefentries=4 polygonreliefangle="90 Angle" airgapwidth=0.254
PolygonConnect Polygon_In4.Cu-GND_ConnectDirect [IsNamedPolygon('In4.Cu-GND')] p118: connectstyle=Direct reliefconductorwidth=0.254 reliefentries=4 polygonreliefangle="90 Angle" airgapwidth=0.254
PolygonConnect Polygon_In3.Cu-GND_ConnectDirect [IsNamedPolygon('In3.Cu-GND')] p119: connectstyle=Direct reliefconductorwidth=0.254 reliefentries=4 polygonreliefangle="90 Angle" airgapwidth=0.254
PolygonConnect Polygon_In2.Cu-GND_ConnectDirect [IsNamedPolygon('In2.Cu-GND')] p120: connectstyle=Direct reliefconductorwidth=0.254 reliefentries=4 polygonreliefangle="90 Angle" airgapwidth=0.254
PolygonConnect Polygon_In1.Cu-GND_ConnectDirect [IsNamedPolygon('In1.Cu-GND')] p121: connectstyle=Direct reliefconductorwidth=0.254 reliefentries=4 polygonreliefangle="90 Angle" airgapwidth=0.254
PolygonConnect Polygon_In3.Cu-/CTRL/PHA_ConnectDirect [IsNamedPolygon('In3.Cu-/CTRL/PHA')] p122: connectstyle=Direct reliefconductorwidth=0.254 reliefentries=4 polygonreliefangle="90 Angle" airgapwidth=0.254
PolygonConnect Polygon_In2.Cu-/CTRL/PHA_ConnectDirect [IsNamedPolygon('In2.Cu-/CTRL/PHA')] p123: connectstyle=Direct reliefconductorwidth=0.254 reliefentries=4 polygonreliefangle="90 Angle" airgapwidth=0.254
PolygonConnect Polygon_In1.Cu-/CTRL/PHA-4_ConnectDirect [IsNamedPolygon('In1.Cu-/CTRL/PHA-4')] p124: connectstyle=Direct reliefconductorwidth=0.254 reliefentries=4 polygonreliefangle="90 Angle" airgapwidth=0.254
PolygonConnect Polygon_In1.Cu-/GND_A-2_ConnectDirect [IsNamedPolygon('In1.Cu-/GND_A-2')] p125: connectstyle=Direct reliefconductorwidth=0.254 reliefentries=4 polygonreliefangle="90 Angle" airgapwidth=0.254
PolygonConnect Polygon_In1.Cu-/CTRL/PHA-3_ConnectDirect [IsNamedPolygon('In1.Cu-/CTRL/PHA-3')] p126: connectstyle=Direct reliefconductorwidth=0.254 reliefentries=4 polygonreliefangle="90 Angle" airgapwidth=0.254
PolygonConnect Polygon_In1.Cu-/CTRL/PWM-BN-1_ConnectDirect [IsNamedPolygon('In1.Cu-/CTRL/PWM-BN-1')] p127: connectstyle=Direct reliefconductorwidth=0.254 reliefentries=4 polygonreliefangle="90 Angle" airgapwidth=0.254
PolygonConnect Polygon_In1.Cu-+3V3-4_ConnectDirect [IsNamedPolygon('In1.Cu-+3V3-4')] p128: connectstyle=Direct reliefconductorwidth=0.254 reliefentries=4 polygonreliefangle="90 Angle" airgapwidth=0.254
PolygonConnect Polygon_In1.Cu-/CTRL/PWM-BP-1_ConnectDirect [IsNamedPolygon('In1.Cu-/CTRL/PWM-BP-1')] p129: connectstyle=Direct reliefconductorwidth=0.254 reliefentries=4 polygonreliefangle="90 Angle" airgapwidth=0.254
PolygonConnect Polygon_In1.Cu-/CTRL/PWM_IN-P-1_ConnectDirect [IsNamedPolygon('In1.Cu-/CTRL/PWM_IN-P-1')] p130: connectstyle=Direct reliefconductorwidth=0.254 reliefentries=4 polygonreliefangle="90 Angle" airgapwidth=0.254
PolygonConnect Polygon_In1.Cu-/CTRL/I_SNS_A-1_ConnectDirect [IsNamedPolygon('In1.Cu-/CTRL/I_SNS_A-1')] p131: connectstyle=Direct reliefconductorwidth=0.254 reliefentries=4 polygonreliefangle="90 Angle" airgapwidth=0.254
PolygonConnect Polygon_In1.Cu-/CTRL/PHC-5_ConnectDirect [IsNamedPolygon('In1.Cu-/CTRL/PHC-5')] p132: connectstyle=Direct reliefconductorwidth=0.254 reliefentries=4 polygonreliefangle="90 Angle" airgapwidth=0.254
PolygonConnect Polygon_In1.Cu-/CTRL/PWM-CP-1_ConnectDirect [IsNamedPolygon('In1.Cu-/CTRL/PWM-CP-1')] p133: connectstyle=Direct reliefconductorwidth=0.254 reliefentries=4 polygonreliefangle="90 Angle" airgapwidth=0.254
PolygonConnect Polygon_In1.Cu-/CTRL/PWM-BP_ConnectDirect [IsNamedPolygon('In1.Cu-/CTRL/PWM-BP')] p134: connectstyle=Direct reliefconductorwidth=0.254 reliefentries=4 polygonreliefangle="90 Angle" airgapwidth=0.254
PolygonConnect Polygon_In1.Cu-Net-(U4-BG_C)-1_ConnectDirect [IsNamedPolygon('In1.Cu-Net-(U4-BG_C)-1')] p135: connectstyle=Direct reliefconductorwidth=0.254 reliefentries=4 polygonreliefangle="90 Angle" airgapwidth=0.254
PolygonConnect Polygon_In1.Cu-/CTRL/PWM_IN-P_ConnectDirect [IsNamedPolygon('In1.Cu-/CTRL/PWM_IN-P')] p136: connectstyle=Direct reliefconductorwidth=0.254 reliefentries=4 polygonreliefangle="90 Angle" airgapwidth=0.254
PolygonConnect Polygon_In1.Cu-/CTRL/PWM-AN-1_ConnectDirect [IsNamedPolygon('In1.Cu-/CTRL/PWM-AN-1')] p137: connectstyle=Direct reliefconductorwidth=0.254 reliefentries=4 polygonreliefangle="90 Angle" airgapwidth=0.254
PolygonConnect Polygon_In1.Cu-Net-(U4-TG_A)-1_ConnectDirect [IsNamedPolygon('In1.Cu-Net-(U4-TG_A)-1')] p138: connectstyle=Direct reliefconductorwidth=0.254 reliefentries=4 polygonreliefangle="90 Angle" airgapwidth=0.254
PolygonConnect Polygon_In1.Cu-/GND_A-1_ConnectDirect [IsNamedPolygon('In1.Cu-/GND_A-1')] p139: connectstyle=Direct reliefconductorwidth=0.254 reliefentries=4 polygonreliefangle="90 Angle" airgapwidth=0.254
PolygonConnect Polygon_In1.Cu-Net-(Q6-Gate)-1_ConnectDirect [IsNamedPolygon('In1.Cu-Net-(Q6-Gate)-1')] p140: connectstyle=Direct reliefconductorwidth=0.254 reliefentries=4 polygonreliefangle="90 Angle" airgapwidth=0.254
PolygonConnect Polygon_In1.Cu-/GND_A_ConnectDirect [IsNamedPolygon('In1.Cu-/GND_A')] p141: connectstyle=Direct reliefconductorwidth=0.254 reliefentries=4 polygonreliefangle="90 Angle" airgapwidth=0.254
PolygonConnect Polygon_In1.Cu-/CTRL/PHA-2_ConnectDirect [IsNamedPolygon('In1.Cu-/CTRL/PHA-2')] p142: connectstyle=Direct reliefconductorwidth=0.254 reliefentries=4 polygonreliefangle="90 Angle" airgapwidth=0.254
PolygonConnect Polygon_In1.Cu-/CTRL/PHB-4_ConnectDirect [IsNamedPolygon('In1.Cu-/CTRL/PHB-4')] p143: connectstyle=Direct reliefconductorwidth=0.254 reliefentries=4 polygonreliefangle="90 Angle" airgapwidth=0.254
PolygonConnect Polygon_In1.Cu-/CTRL/I_SNS_B_ConnectDirect [IsNamedPolygon('In1.Cu-/CTRL/I_SNS_B')] p144: connectstyle=Direct reliefconductorwidth=0.254 reliefentries=4 polygonreliefangle="90 Angle" airgapwidth=0.254
PolygonConnect Polygon_In1.Cu-Net-(Q5-Gate)-1_ConnectDirect [IsNamedPolygon('In1.Cu-Net-(Q5-Gate)-1')] p145: connectstyle=Direct reliefconductorwidth=0.254 reliefentries=4 polygonreliefangle="90 Angle" airgapwidth=0.254
PolygonConnect Polygon_In1.Cu-/GND_C-2_ConnectDirect [IsNamedPolygon('In1.Cu-/GND_C-2')] p146: connectstyle=Direct reliefconductorwidth=0.254 reliefentries=4 polygonreliefangle="90 Angle" airgapwidth=0.254
PolygonConnect Polygon_In1.Cu-/CTRL/PHA-1_ConnectDirect [IsNamedPolygon('In1.Cu-/CTRL/PHA-1')] p147: connectstyle=Direct reliefconductorwidth=0.254 reliefentries=4 polygonreliefangle="90 Angle" airgapwidth=0.254
PolygonConnect Polygon_In1.Cu-/CTRL/VREF_U_ConnectDirect [IsNamedPolygon('In1.Cu-/CTRL/VREF_U')] p148: connectstyle=Direct reliefconductorwidth=0.254 reliefentries=4 polygonreliefangle="90 Angle" airgapwidth=0.254
PolygonConnect Polygon_In1.Cu-+3V3-3_ConnectDirect [IsNamedPolygon('In1.Cu-+3V3-3')] p149: connectstyle=Direct reliefconductorwidth=0.254 reliefentries=4 polygonreliefangle="90 Angle" airgapwidth=0.254
PolygonConnect Polygon_In1.Cu-Net-(U4-TG_B)-1_ConnectDirect [IsNamedPolygon('In1.Cu-Net-(U4-TG_B)-1')] p150: connectstyle=Direct reliefconductorwidth=0.254 reliefentries=4 polygonreliefangle="90 Angle" airgapwidth=0.254
PolygonConnect Polygon_In1.Cu-/CTRL/PHB-3_ConnectDirect [IsNamedPolygon('In1.Cu-/CTRL/PHB-3')] p151: connectstyle=Direct reliefconductorwidth=0.254 reliefentries=4 polygonreliefangle="90 Angle" airgapwidth=0.254
PolygonConnect Polygon_In1.Cu-+3V3-2_ConnectDirect [IsNamedPolygon('In1.Cu-+3V3-2')] p152: connectstyle=Direct reliefconductorwidth=0.254 reliefentries=4 polygonreliefangle="90 Angle" airgapwidth=0.254
PolygonConnect Polygon_In1.Cu-/CTRL/PHB-2_ConnectDirect [IsNamedPolygon('In1.Cu-/CTRL/PHB-2')] p153: connectstyle=Direct reliefconductorwidth=0.254 reliefentries=4 polygonreliefangle="90 Angle" airgapwidth=0.254
PolygonConnect Polygon_In1.Cu-/CTRL/PWM-AP_ConnectDirect [IsNamedPolygon('In1.Cu-/CTRL/PWM-AP')] p154: connectstyle=Direct reliefconductorwidth=0.254 reliefentries=4 polygonreliefangle="90 Angle" airgapwidth=0.254
PolygonConnect Polygon_In1.Cu-/CTRL/PWM-CN-1_ConnectDirect [IsNamedPolygon('In1.Cu-/CTRL/PWM-CN-1')] p155: connectstyle=Direct reliefconductorwidth=0.254 reliefentries=4 polygonreliefangle="90 Angle" airgapwidth=0.254
PolygonConnect Polygon_In1.Cu-/CTRL/BEMF_U_ConnectDirect [IsNamedPolygon('In1.Cu-/CTRL/BEMF_U')] p156: connectstyle=Direct reliefconductorwidth=0.254 reliefentries=4 polygonreliefangle="90 Angle" airgapwidth=0.254
PolygonConnect Polygon_In1.Cu-Net-(U4-TG_A)_ConnectDirect [IsNamedPolygon('In1.Cu-Net-(U4-TG_A)')] p157: connectstyle=Direct reliefconductorwidth=0.254 reliefentries=4 polygonreliefangle="90 Angle" airgapwidth=0.254
PolygonConnect Polygon_In1.Cu-/CTRL/PWM-AN_ConnectDirect [IsNamedPolygon('In1.Cu-/CTRL/PWM-AN')] p158: connectstyle=Direct reliefconductorwidth=0.254 reliefentries=4 polygonreliefangle="90 Angle" airgapwidth=0.254
PolygonConnect Polygon_In1.Cu-Net-(U4-TG_C)-1_ConnectDirect [IsNamedPolygon('In1.Cu-Net-(U4-TG_C)-1')] p159: connectstyle=Direct reliefconductorwidth=0.254 reliefentries=4 polygonreliefangle="90 Angle" airgapwidth=0.254
PolygonConnect Polygon_In1.Cu-/CTRL/PHC-4_ConnectDirect [IsNamedPolygon('In1.Cu-/CTRL/PHC-4')] p160: connectstyle=Direct reliefconductorwidth=0.254 reliefentries=4 polygonreliefangle="90 Angle" airgapwidth=0.254
PolygonConnect Polygon_In1.Cu-VBUS-2_ConnectDirect [IsNamedPolygon('In1.Cu-VBUS-2')] p161: connectstyle=Direct reliefconductorwidth=0.254 reliefentries=4 polygonreliefangle="90 Angle" airgapwidth=0.254
PolygonConnect Polygon_In1.Cu-Net-(Q2-Gate)-1_ConnectDirect [IsNamedPolygon('In1.Cu-Net-(Q2-Gate)-1')] p162: connectstyle=Direct reliefconductorwidth=0.254 reliefentries=4 polygonreliefangle="90 Angle" airgapwidth=0.254
PolygonConnect Polygon_In1.Cu-Net-(U4-BG_B)-1_ConnectDirect [IsNamedPolygon('In1.Cu-Net-(U4-BG_B)-1')] p163: connectstyle=Direct reliefconductorwidth=0.254 reliefentries=4 polygonreliefangle="90 Angle" airgapwidth=0.254
PolygonConnect Polygon_In1.Cu-Net-(Q1-Gate)_ConnectDirect [IsNamedPolygon('In1.Cu-Net-(Q1-Gate)')] p164: connectstyle=Direct reliefconductorwidth=0.254 reliefentries=4 polygonreliefangle="90 Angle" airgapwidth=0.254
PolygonConnect Polygon_In1.Cu-/CTRL/PHC-3_ConnectDirect [IsNamedPolygon('In1.Cu-/CTRL/PHC-3')] p165: connectstyle=Direct reliefconductorwidth=0.254 reliefentries=4 polygonreliefangle="90 Angle" airgapwidth=0.254
PolygonConnect Polygon_In1.Cu-/CTRL/PHC-2_ConnectDirect [IsNamedPolygon('In1.Cu-/CTRL/PHC-2')] p166: connectstyle=Direct reliefconductorwidth=0.254 reliefentries=4 polygonreliefangle="90 Angle" airgapwidth=0.254
PolygonConnect Polygon_In1.Cu-+3V3-1_ConnectDirect [IsNamedPolygon('In1.Cu-+3V3-1')] p167: connectstyle=Direct reliefconductorwidth=0.254 reliefentries=4 polygonreliefangle="90 Angle" airgapwidth=0.254
PolygonConnect Polygon_In1.Cu-Net-(U4-BG_A)-2_ConnectDirect [IsNamedPolygon('In1.Cu-Net-(U4-BG_A)-2')] p168: connectstyle=Direct reliefconductorwidth=0.254 reliefentries=4 polygonreliefangle="90 Angle" airgapwidth=0.254
PolygonConnect Polygon_In1.Cu-/GND_C-1_ConnectDirect [IsNamedPolygon('In1.Cu-/GND_C-1')] p169: connectstyle=Direct reliefconductorwidth=0.254 reliefentries=4 polygonreliefangle="90 Angle" airgapwidth=0.254
PolygonConnect Polygon_In1.Cu-/CTRL/PHC-1_ConnectDirect [IsNamedPolygon('In1.Cu-/CTRL/PHC-1')] p170: connectstyle=Direct reliefconductorwidth=0.254 reliefentries=4 polygonreliefangle="90 Angle" airgapwidth=0.254
PolygonConnect Polygon_In1.Cu-/CTRL/PWM-CP_ConnectDirect [IsNamedPolygon('In1.Cu-/CTRL/PWM-CP')] p171: connectstyle=Direct reliefconductorwidth=0.254 reliefentries=4 polygonreliefangle="90 Angle" airgapwidth=0.254
PolygonConnect Polygon_In1.Cu-Net-(Q6-Gate)_ConnectDirect [IsNamedPolygon('In1.Cu-Net-(Q6-Gate)')] p172: connectstyle=Direct reliefconductorwidth=0.254 reliefentries=4 polygonreliefangle="90 Angle" airgapwidth=0.254
PolygonConnect Polygon_In1.Cu-VBUS-1_ConnectDirect [IsNamedPolygon('In1.Cu-VBUS-1')] p173: connectstyle=Direct reliefconductorwidth=0.254 reliefentries=4 polygonreliefangle="90 Angle" airgapwidth=0.254
PolygonConnect Polygon_In1.Cu-Net-(U4-BG_A)-1_ConnectDirect [IsNamedPolygon('In1.Cu-Net-(U4-BG_A)-1')] p174: connectstyle=Direct reliefconductorwidth=0.254 reliefentries=4 polygonreliefangle="90 Angle" airgapwidth=0.254
PolygonConnect Polygon_In1.Cu-/CTRL/PWM-BN_ConnectDirect [IsNamedPolygon('In1.Cu-/CTRL/PWM-BN')] p175: connectstyle=Direct reliefconductorwidth=0.254 reliefentries=4 polygonreliefangle="90 Angle" airgapwidth=0.254
PolygonConnect Polygon_In1.Cu-Net-(Q2-Gate)_ConnectDirect [IsNamedPolygon('In1.Cu-Net-(Q2-Gate)')] p176: connectstyle=Direct reliefconductorwidth=0.254 reliefentries=4 polygonreliefangle="90 Angle" airgapwidth=0.254
PolygonConnect Polygon_In1.Cu-/CTRL/PHB-1_ConnectDirect [IsNamedPolygon('In1.Cu-/CTRL/PHB-1')] p177: connectstyle=Direct reliefconductorwidth=0.254 reliefentries=4 polygonreliefangle="90 Angle" airgapwidth=0.254
PolygonConnect Polygon_In1.Cu-/CTRL/PWM-CN_ConnectDirect [IsNamedPolygon('In1.Cu-/CTRL/PWM-CN')] p178: connectstyle=Direct reliefconductorwidth=0.254 reliefentries=4 polygonreliefangle="90 Angle" airgapwidth=0.254
PolygonConnect Polygon_In1.Cu-/CTRL/PHA_ConnectDirect [IsNamedPolygon('In1.Cu-/CTRL/PHA')] p179: connectstyle=Direct reliefconductorwidth=0.254 reliefentries=4 polygonreliefangle="90 Angle" airgapwidth=0.254
PolygonConnect Polygon_In1.Cu-/GND_C_ConnectDirect [IsNamedPolygon('In1.Cu-/GND_C')] p180: connectstyle=Direct reliefconductorwidth=0.254 reliefentries=4 polygonreliefangle="90 Angle" airgapwidth=0.254
PolygonConnect Polygon_In1.Cu-/CTRL/PHB_ConnectDirect [IsNamedPolygon('In1.Cu-/CTRL/PHB')] p181: connectstyle=Direct reliefconductorwidth=0.254 reliefentries=4 polygonreliefangle="90 Angle" airgapwidth=0.254
PolygonConnect Polygon_In1.Cu-+3V3_ConnectDirect [IsNamedPolygon('In1.Cu-+3V3')] p182: connectstyle=Direct reliefconductorwidth=0.254 reliefentries=4 polygonreliefangle="90 Angle" airgapwidth=0.254
PolygonConnect Polygon_In1.Cu-/CTRL/I_SNS_A_ConnectDirect [IsNamedPolygon('In1.Cu-/CTRL/I_SNS_A')] p183: connectstyle=Direct reliefconductorwidth=0.254 reliefentries=4 polygonreliefangle="90 Angle" airgapwidth=0.254
PolygonConnect Polygon_In1.Cu-Net-(U4-BG_C)_ConnectDirect [IsNamedPolygon('In1.Cu-Net-(U4-BG_C)')] p184: connectstyle=Direct reliefconductorwidth=0.254 reliefentries=4 polygonreliefangle="90 Angle" airgapwidth=0.254
PolygonConnect Polygon_In1.Cu-/CTRL/PHC_ConnectDirect [IsNamedPolygon('In1.Cu-/CTRL/PHC')] p185: connectstyle=Direct reliefconductorwidth=0.254 reliefentries=4 polygonreliefangle="90 Angle" airgapwidth=0.254
PolygonConnect Polygon_In1.Cu-Net-(U4-BG_A)_ConnectDirect [IsNamedPolygon('In1.Cu-Net-(U4-BG_A)')] p186: connectstyle=Direct reliefconductorwidth=0.254 reliefentries=4 polygonreliefangle="90 Angle" airgapwidth=0.254
PolygonConnect Polygon_In1.Cu-Net-(Q5-Gate)_ConnectDirect [IsNamedPolygon('In1.Cu-Net-(Q5-Gate)')] p187: connectstyle=Direct reliefconductorwidth=0.254 reliefentries=4 polygonreliefangle="90 Angle" airgapwidth=0.254
PolygonConnect Polygon_In1.Cu-Net-(U4-TG_C)_ConnectDirect [IsNamedPolygon('In1.Cu-Net-(U4-TG_C)')] p188: connectstyle=Direct reliefconductorwidth=0.254 reliefentries=4 polygonreliefangle="90 Angle" airgapwidth=0.254
PolygonConnect Polygon_In1.Cu-Net-(U4-TG_B)_ConnectDirect [IsNamedPolygon('In1.Cu-Net-(U4-TG_B)')] p189: connectstyle=Direct reliefconductorwidth=0.254 reliefentries=4 polygonreliefangle="90 Angle" airgapwidth=0.254
PolygonConnect Polygon_In1.Cu-Net-(U4-BG_B)_ConnectDirect [IsNamedPolygon('In1.Cu-Net-(U4-BG_B)')] p190: connectstyle=Direct reliefconductorwidth=0.254 reliefentries=4 polygonreliefangle="90 Angle" airgapwidth=0.254
PolygonConnect Polygon_B.Cu-/CTRL/PHC_ConnectDirect [IsNamedPolygon('B.Cu-/CTRL/PHC')] p191: connectstyle=Direct reliefconductorwidth=0.254 reliefentries=4 polygonreliefangle="90 Angle" airgapwidth=0.254
PolygonConnect Polygon_F.Cu-/CTRL/PHC-3_ConnectDirect [IsNamedPolygon('F.Cu-/CTRL/PHC-3')] p192: connectstyle=Direct reliefconductorwidth=0.254 reliefentries=4 polygonreliefangle="90 Angle" airgapwidth=0.254
PolygonConnect Polygon_B.Cu-/CTRL/PHA_ConnectDirect [IsNamedPolygon('B.Cu-/CTRL/PHA')] p193: connectstyle=Direct reliefconductorwidth=0.254 reliefentries=4 polygonreliefangle="90 Angle" airgapwidth=0.254
PolygonConnect Polygon_F.Cu-/CTRL/PHA-2_ConnectDirect [IsNamedPolygon('F.Cu-/CTRL/PHA-2')] p194: connectstyle=Direct reliefconductorwidth=0.254 reliefentries=4 polygonreliefangle="90 Angle" airgapwidth=0.254
PolygonConnect Polygon_B.Cu-VBUS_ConnectDirect [IsNamedPolygon('B.Cu-VBUS')] p195: connectstyle=Direct reliefconductorwidth=0.254 reliefentries=4 polygonreliefangle="90 Angle" airgapwidth=0.254
PolygonConnect Polygon_In4.Cu-VBUS_ConnectDirect [IsNamedPolygon('In4.Cu-VBUS')] p196: connectstyle=Direct reliefconductorwidth=0.254 reliefentries=4 polygonreliefangle="90 Angle" airgapwidth=0.254
PolygonConnect Polygon_In3.Cu-VBUS_ConnectDirect [IsNamedPolygon('In3.Cu-VBUS')] p197: connectstyle=Direct reliefconductorwidth=0.254 reliefentries=4 polygonreliefangle="90 Angle" airgapwidth=0.254
PolygonConnect Polygon_In2.Cu-VBUS_ConnectDirect [IsNamedPolygon('In2.Cu-VBUS')] p198: connectstyle=Direct reliefconductorwidth=0.254 reliefentries=4 polygonreliefangle="90 Angle" airgapwidth=0.254
PolygonConnect Polygon_In1.Cu-VBUS_ConnectDirect [IsNamedPolygon('In1.Cu-VBUS')] p199: connectstyle=Direct reliefconductorwidth=0.254 reliefentries=4 polygonreliefangle="90 Angle" airgapwidth=0.254
PolygonConnect Polygon_F.Cu-VBUS-4_ConnectDirect [IsNamedPolygon('F.Cu-VBUS-4')] p200: connectstyle=Direct reliefconductorwidth=0.254 reliefentries=4 polygonreliefangle="90 Angle" airgapwidth=0.254
PolygonConnect Polygon_F.Cu-GND-3_ConnectDirect [IsNamedPolygon('F.Cu-GND-3')] p201: connectstyle=Direct reliefconductorwidth=0.254 reliefentries=4 polygonreliefangle="90 Angle" airgapwidth=0.254
PolygonConnect Polygon_F.Cu-VBUS-3_ConnectDirect [IsNamedPolygon('F.Cu-VBUS-3')] p202: connectstyle=Direct reliefconductorwidth=0.254 reliefentries=4 polygonreliefangle="90 Angle" airgapwidth=0.254
PolygonConnect Polygon_F.Cu-/CTRL/PHA-1_ConnectDirect [IsNamedPolygon('F.Cu-/CTRL/PHA-1')] p203: connectstyle=Direct reliefconductorwidth=0.254 reliefentries=4 polygonreliefangle="90 Angle" airgapwidth=0.254
PolygonConnect Polygon_F.Cu-Net-(U4-BG_C)-1_ConnectDirect [IsNamedPolygon('F.Cu-Net-(U4-BG_C)-1')] p204: connectstyle=Direct reliefconductorwidth=0.254 reliefentries=4 polygonreliefangle="90 Angle" airgapwidth=0.254
PolygonConnect Polygon_F.Cu-Net-(U4-TG_C)-1_ConnectDirect [IsNamedPolygon('F.Cu-Net-(U4-TG_C)-1')] p205: connectstyle=Direct reliefconductorwidth=0.254 reliefentries=4 polygonreliefangle="90 Angle" airgapwidth=0.254
PolygonConnect Polygon_F.Cu-/CTRL/PHC-2_ConnectDirect [IsNamedPolygon('F.Cu-/CTRL/PHC-2')] p206: connectstyle=Direct reliefconductorwidth=0.254 reliefentries=4 polygonreliefangle="90 Angle" airgapwidth=0.254
PolygonConnect Polygon_F.Cu-/CTRL/PHB-4_ConnectDirect [IsNamedPolygon('F.Cu-/CTRL/PHB-4')] p207: connectstyle=Direct reliefconductorwidth=0.254 reliefentries=4 polygonreliefangle="90 Angle" airgapwidth=0.254
PolygonConnect Polygon_F.Cu-Net-(U4-BG_B)_ConnectDirect [IsNamedPolygon('F.Cu-Net-(U4-BG_B)')] p208: connectstyle=Direct reliefconductorwidth=0.254 reliefentries=4 polygonreliefangle="90 Angle" airgapwidth=0.254
PolygonConnect Polygon_F.Cu-/CTRL/PHB-3_ConnectDirect [IsNamedPolygon('F.Cu-/CTRL/PHB-3')] p209: connectstyle=Direct reliefconductorwidth=0.254 reliefentries=4 polygonreliefangle="90 Angle" airgapwidth=0.254
PolygonConnect Polygon_F.Cu-VBUS-2_ConnectDirect [IsNamedPolygon('F.Cu-VBUS-2')] p210: connectstyle=Direct reliefconductorwidth=0.254 reliefentries=4 polygonreliefangle="90 Angle" airgapwidth=0.254
PolygonConnect Polygon_F.Cu-/CTRL/PWM-CN_ConnectDirect [IsNamedPolygon('F.Cu-/CTRL/PWM-CN')] p211: connectstyle=Direct reliefconductorwidth=0.254 reliefentries=4 polygonreliefangle="90 Angle" airgapwidth=0.254
PolygonConnect Polygon_F.Cu-Net-(Q6-Gate)-2_ConnectDirect [IsNamedPolygon('F.Cu-Net-(Q6-Gate)-2')] p212: connectstyle=Direct reliefconductorwidth=0.254 reliefentries=4 polygonreliefangle="90 Angle" airgapwidth=0.254
PolygonConnect Polygon_F.Cu-Net-(Q2-Gate)-1_ConnectDirect [IsNamedPolygon('F.Cu-Net-(Q2-Gate)-1')] p213: connectstyle=Direct reliefconductorwidth=0.254 reliefentries=4 polygonreliefangle="90 Angle" airgapwidth=0.254
PolygonConnect Polygon_F.Cu-/CTRL/VREF_U-1_ConnectDirect [IsNamedPolygon('F.Cu-/CTRL/VREF_U-1')] p214: connectstyle=Direct reliefconductorwidth=0.254 reliefentries=4 polygonreliefangle="90 Angle" airgapwidth=0.254
PolygonConnect Polygon_F.Cu-/CTRL/PHB-2_ConnectDirect [IsNamedPolygon('F.Cu-/CTRL/PHB-2')] p215: connectstyle=Direct reliefconductorwidth=0.254 reliefentries=4 polygonreliefangle="90 Angle" airgapwidth=0.254
PolygonConnect Polygon_F.Cu-Net-(U4-BG_C)_ConnectDirect [IsNamedPolygon('F.Cu-Net-(U4-BG_C)')] p216: connectstyle=Direct reliefconductorwidth=0.254 reliefentries=4 polygonreliefangle="90 Angle" airgapwidth=0.254
PolygonConnect Polygon_F.Cu-GND-2_ConnectDirect [IsNamedPolygon('F.Cu-GND-2')] p217: connectstyle=Direct reliefconductorwidth=0.254 reliefentries=4 polygonreliefangle="90 Angle" airgapwidth=0.254
PolygonConnect Polygon_F.Cu-Net-(U4-BG_A)-1_ConnectDirect [IsNamedPolygon('F.Cu-Net-(U4-BG_A)-1')] p218: connectstyle=Direct reliefconductorwidth=0.254 reliefentries=4 polygonreliefangle="90 Angle" airgapwidth=0.254